# EAGLE board PCB Layout Project Akhir (EAGLE 9.2.0)
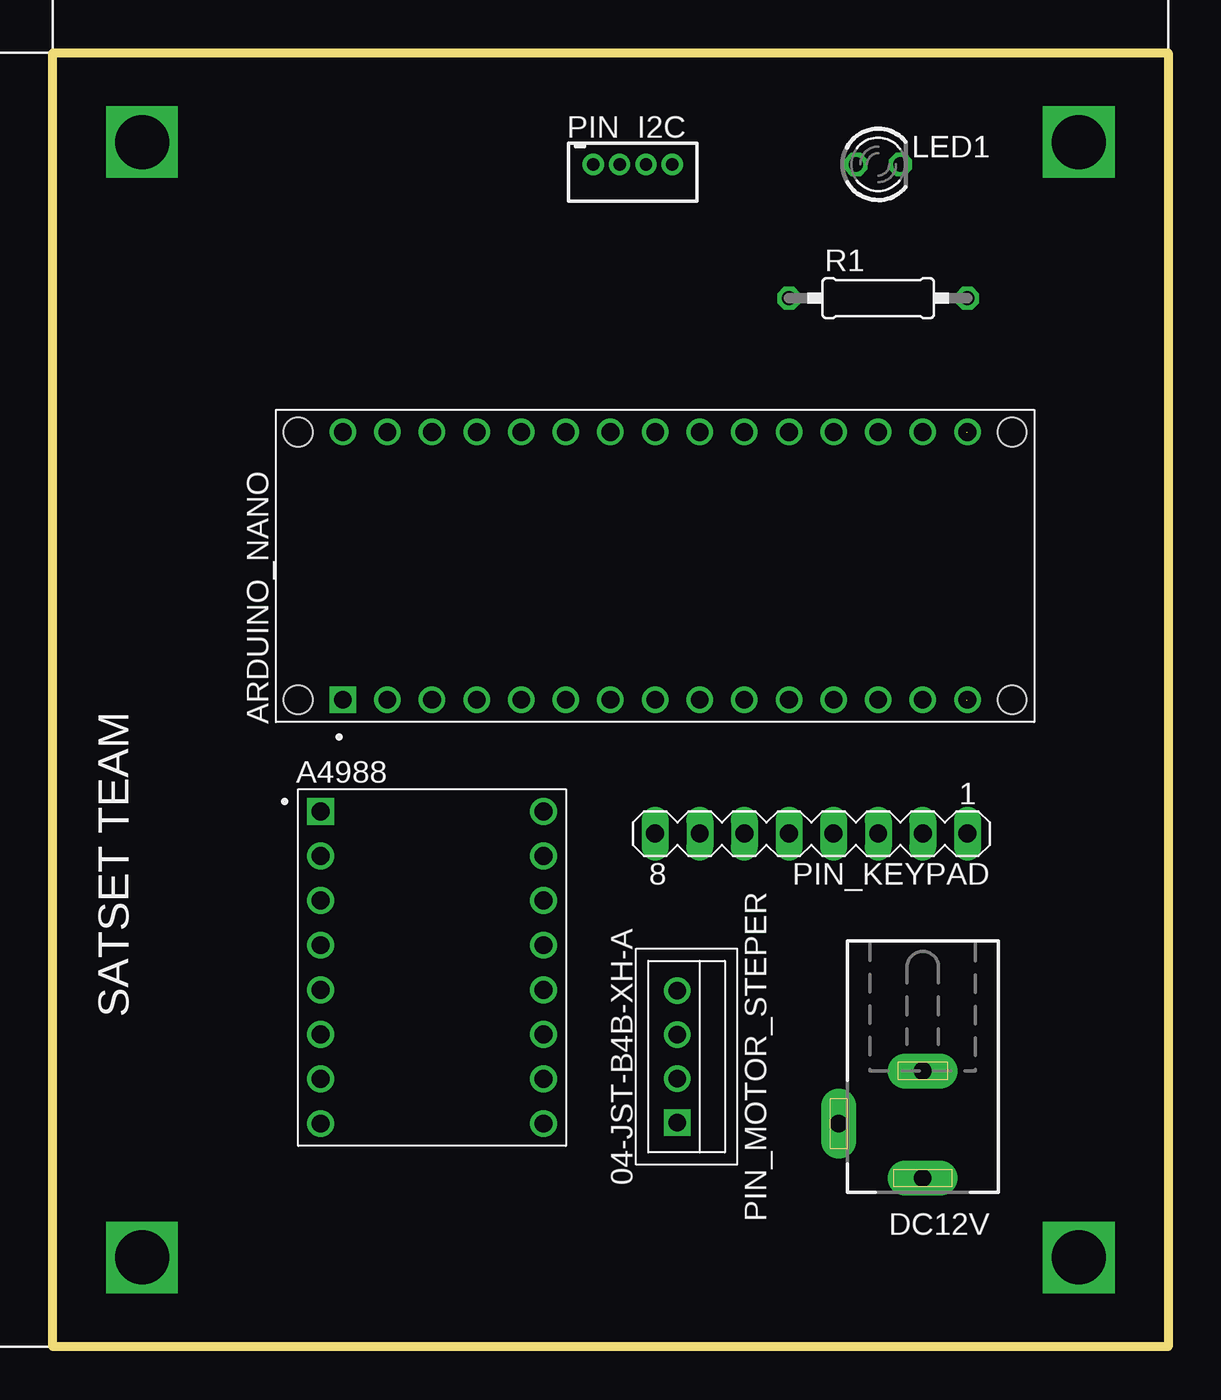
[diagram p0: board, top side]
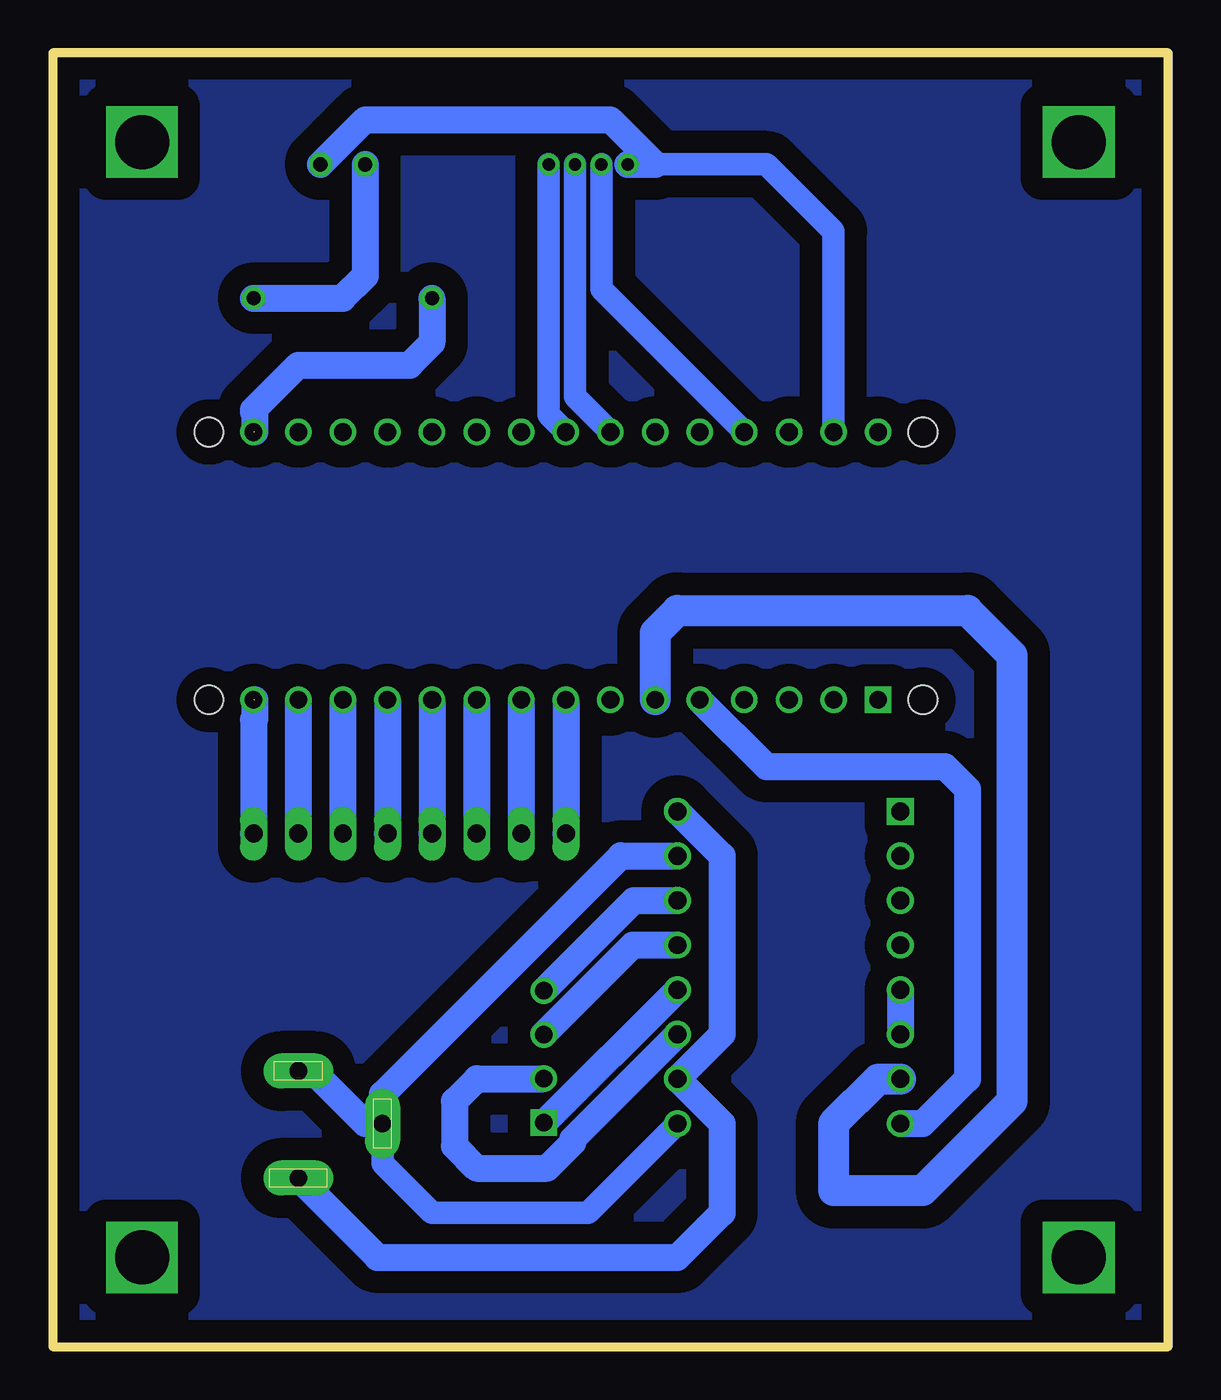
[diagram p1: board, bottom side, seen from below]

Size 63.5 x 73.66 mm. Coordinates in mm from the lower left corner, seen from the top.
Outline: 0,73.66 63.5,73.66 63.5,0 0,0 0,73.66
Copper layers (1*16): Top 0.035mm / dielectric 1.5mm / Bottom 0.035mm
Design rules "default *": minimum track width 6mil, minimum drill 0.35mm, track to track 50mil, track to pad 50mil, pad to pad 50mil, via to via 50mil, smd to smd 50mil, copper to edge 40mil, drill to drill 6mil, minimum pad ring 10mil, minimum via ring 8mil, stop-mask expansion 4mil, vias tented up to drill 0mil, thermal gap 10mil

## Footprints (pad centres in the part's own frame; a part is rotated, then mirrored left to right if it is on the bottom)
MODULE_A4988_STEPPER_MOTOR_DRIVER_CARRIER = drill 1.02 square: 1 -6.35,8.89 | drill 1.02: 2 -6.35,6.35; 3 -6.35,3.81; 4 -6.35,1.27; 5 -6.35,-1.27; 6 -6.35,-3.81; 7 -6.35,-6.35; 8 -6.35,-8.89; 9 6.35,-8.89; 10 6.35,-6.35; 11 6.35,-3.81; 12 6.35,-1.27; 13 6.35,1.27; 14 6.35,3.81; 15 6.35,6.35; 16 6.35,8.89
MODULE_A000005 = drill 1 square: 1 -7.62,17.78 | drill 1: 2 -7.62,15.24; 3 -7.62,12.7; 4 -7.62,10.16; 5 -7.62,7.62; 6 -7.62,5.08; 7 -7.62,2.54; 8 -7.62,0; 9 -7.62,-2.54; 10 -7.62,-5.08; 11 -7.62,-7.62; 12 -7.62,-10.16; 13 -7.62,-12.7; 14 -7.62,-15.24; 15 -7.62,-17.78; 16 7.62,-17.78; 17 7.62,-15.24; 18 7.62,-12.7; 19 7.62,-10.16; 20 7.62,-7.62; 21 7.62,-5.08; 22 7.62,-2.54; 23 7.62,0; 24 7.62,2.54; 25 7.62,5.08; 26 7.62,7.62; 27 7.62,10.16; 28 7.62,12.7; 29 7.62,15.24; 30 7.62,17.78 | hole 1.651: -7.62,-20.32; 7.62,-20.32; -7.62,20.32; 7.62,20.32
DCJ0202 = drill 1 pad 2 long: 1 0,3.1; 2 4.8,0; 3 0,-3
LED3MM = drill 0.813 octagon: A -1.27,0; K 1.27,0
B4B-ZR = drill 0.7 pad 1.1: 1 -2.25,0; 2 -0.75,0; 3 0.75,0; 4 2.25,0
MA08-1 = drill 1.016 long: 1 -8.89,0; 2 -6.35,0; 3 -3.81,0; 4 -1.27,0; 5 1.27,0; 6 3.81,0; 7 6.35,0; 8 8.89,0
B4B-XH = drill 1 square: P$1 3.75,0 | drill 1: P$2 1.25,0; P$3 -1.25,0; P$4 -3.75,0
0207/10 = drill 0.813 octagon: 1 -5.08,0; 2 5.08,0

## Placement (x,y rotation side)
A4988  A4988_STEPPER_MOTOR_DRIVER_CARRIER  [MODULE_A4988_STEPPER_MOTOR_DRIVER_CARRIER]  21.59,21.59 0 top
ARDUINO_NANO  A000005  [MODULE_A000005]  34.29,44.45 90 top
DC12V  DCJ0202  [DCJ0202]  49.53,12.7 180 top
LED1  [LED3MM]  46.99,67.31 0 top
PIN_I2C  B4B-ZR  [B4B-ZR]  33.02,67.31 0 top
PIN_KEYPAD  [MA08-1]  43.18,29.21 180 top
PIN_MOTOR_STEPER  04-JST-B4B-XH-A  [B4B-XH]  35.56,16.51 270 top
R1  [0207/10]  46.99,59.69 0 top

## Library data of the parts
A4988 = A4988_STEPPER_MOTOR_DRIVER_CARRIER; AVAILABILITY: Not in stock; CHECK_PRICES: https://www.snapeda.com/parts/A4988%20STEPPER%20MOTOR%20DRIVER%20CARRIER/Pololu/view-part/?ref=eda; DESCRIPTION: Stepper Motor Driver; MF: Pololu; MP: A4988 STEPPER MOTOR DRIVER CARRIER; PACKAGE: None; PRICE: None; SNAPEDA_LINK: https://www.snapeda.com/parts/A4988%20STEPPER%20MOTOR%20DRIVER%20CARRIER/Pololu/view-part/?ref=snap
ARDUINO_NANO = A000005; AVAILABILITY: In Stock; CHECK_PRICES: https://www.snapeda.com/parts/A000005/Arduino/view-part/?ref=eda; DESCRIPTION: Arduino Nano Microcontroller Board, ATmega328 | Arduino A000005; MF: Arduino; MP: A000005; PACKAGE: Non-Standard Arduino; PRICE: None; PURCHASE-URL: https://www.snapeda.com/api/url_track_click_mouser/?unipart_id=41206&manufacturer=Arduino&part_name=A000005&search_term=arduino; SNAPEDA_LINK: https://www.snapeda.com/parts/A000005/Arduino/view-part/?ref=snap
DC12V = con-jack; OC_FARNELL: unknown; OC_NEWARK: unknown
LED1 = led
PIN_I2C = con-jst; MF: FARNELL; MPN: B4B-ZR(LF)(SN); OC_FARNELL: 1830916; OC_NEWARK: 37K9960
PIN_KEYPAD = con-lstb; OC_FARNELL: unknown; OC_NEWARK: unknown
PIN_MOTOR_STEPER = bt_con-jst-xh
R1 = rcl; SPICEPREFIX: R

## Nets
3V3: ARDUINO_NANO.17
GND_1: ARDUINO_NANO.4
N$1: ARDUINO_NANO.23 PIN_I2C.4
N$2: ARDUINO_NANO.24 PIN_I2C.3
N$3: ARDUINO_NANO.15 PIN_KEYPAD.1
N$4: A4988.12 PIN_MOTOR_STEPER.P$1
N$5: ARDUINO_NANO.14 PIN_KEYPAD.2
N$6: ARDUINO_NANO.13 PIN_KEYPAD.3
N$7: A4988.8 ARDUINO_NANO.5
N$8: A4988.7 ARDUINO_NANO.6
N$9: ARDUINO_NANO.12 PIN_KEYPAD.4
N$10: ARDUINO_NANO.11 PIN_KEYPAD.5
N$11: ARDUINO_NANO.10 PIN_KEYPAD.6
N$12: ARDUINO_NANO.9 PIN_KEYPAD.7
N$13: ARDUINO_NANO.8 PIN_KEYPAD.8
N$14: ARDUINO_NANO.16 R1.1
N$15: LED1.A R1.2
N$17: A4988.11 PIN_MOTOR_STEPER.P$2
N$18: A4988.13 PIN_MOTOR_STEPER.P$3
N$19: A4988.14 PIN_MOTOR_STEPER.P$4
N$20: A4988.5 A4988.6
N$21: A4988.10 A4988.16 DC12V.1
N$22: A4988.9 A4988.15 DC12V.2 DC12V.3
N$24: ARDUINO_NANO.29 LED1.K PIN_I2C.1
N$25: ARDUINO_NANO.27 PIN_I2C.2
VIN: ARDUINO_NANO.30

## Tracks (layer width: path | path; a pad name or v marks a point on that pad's centre or on a via)
GND
  pour Bottom: 0,73.66 63.5,73.66 63.5,0 0,0
N$1
  Bottom 1.27: PIN_I2C.4 35.27,53.05 ARDUINO_NANO.23
N$2
  Bottom 1.27: PIN_I2C.3 33.77,54.09 ARDUINO_NANO.24
N$3  (1 unrouted)
  Bottom 1.524: PIN_KEYPAD.1 52.07,35.69 52.01,35.75 52.01,36.83
N$4
  Bottom 1.524: A4988.12 35.5,12.76 PIN_MOTOR_STEPER.P$1
N$5
  Bottom 1.524: ARDUINO_NANO.14 PIN_KEYPAD.2
N$6
  Bottom 1.524: ARDUINO_NANO.13 PIN_KEYPAD.3
N$7
  Bottom 1.524: ARDUINO_NANO.5 22.86,33.02 12.7,33.02 11.43,31.75 11.43,15.24 13.97,12.7 A4988.8
N$8
  Bottom 1.778: ARDUINO_NANO.6 29.21,40.64 27.94,41.91 11.43,41.91 8.89,39.37 8.89,13.97 13.97,8.89 19.05,8.89 19.05,12.7 16.51,15.24 A4988.7
N$9
  Bottom 1.524: ARDUINO_NANO.12 PIN_KEYPAD.4
N$10
  Bottom 1.524: ARDUINO_NANO.11 PIN_KEYPAD.5
N$11
  Bottom 1.524: ARDUINO_NANO.10 PIN_KEYPAD.6
N$12
  Bottom 1.524: ARDUINO_NANO.9 PIN_KEYPAD.7
N$13
  Bottom 1.524: ARDUINO_NANO.8 PIN_KEYPAD.8
N$14  (1 unrouted)
  Bottom 1.524: R1.1 41.91,57.15 43.18,55.88 49.53,55.88 52.07,53.34 | 52.07,53.34 52.07,53.21 52.01,53.15 | 52.01,53.15 52.01,52.07 | 52.01,53.15 52.01,53.28 52.07,53.34
N$15
  Bottom 1.524: LED1.A 45.72,60.96 46.99,59.69 R1.2
N$16  (via drill 0.35)
  other vias: 46.99,80.01
N$17
  Bottom 1.524: A4988.11 33.89,11.83 33.89,11.63 35.36,10.16 39.37,10.16 40.64,11.43 40.64,13.97 39.35,15.26 PIN_MOTOR_STEPER.P$2
N$18
  Bottom 1.524: A4988.13 30.48,22.86 35.56,17.78 PIN_MOTOR_STEPER.P$3
N$19
  Bottom 1.524: A4988.14 30.42,25.4 PIN_MOTOR_STEPER.P$4
N$20
  Bottom 1.524: A4988.5 A4988.6
N$21
  Bottom 1.524: A4988.16 25.4,27.94 25.4,17.78 A4988.10 25.4,12.7 25.4,7.62 27.94,5.08 45.01,5.08 DC12V.1
N$22
  Bottom 1.27: A4988.9 33.02,7.62 41.91,7.62 44.73,10.44 DC12V.2
  Bottom 1.524: DC12V.3 48.72,15.7 45.72,12.7 DC12V.2 44.73,14.37 31.16,27.94 A4988.15
N$24
  Bottom 1.27: ARDUINO_NANO.29 19.05,63.5 22.86,67.31 29.21,67.31
  Bottom 1.524: PIN_I2C.1 29.21,67.31 31.75,69.85 45.72,69.85 LED1.K
N$25
  Bottom 1.27: PIN_I2C.2 32.27,60.21 ARDUINO_NANO.27
N$26  (via drill 3.07)
  other vias: 5.08,68.58
N$27  (via drill 3.07)
  other vias: 58.42,68.58
N$28  (via drill 3.07)
  other vias: 58.42,5.08
N$29  (via drill 3.07)
  other vias: 5.08,5.08
N$30
  Bottom 0.508: 63.5,73.66 0,73.66 0,0 63.5,0 63.5,73.66

## Text on the board
tNames: SATSET TEAM